# Altium PCB PCB2.PcbDoc
Units mm, origin at the board's own origin, x right, y up, seen from the top; angles counter-clockwise.
Board outline 145.8 x 166.24 mm, 2 copper layers (Top Layer, Bottom Layer); 14 components, 30 nets, 83 pads, 6 vias.
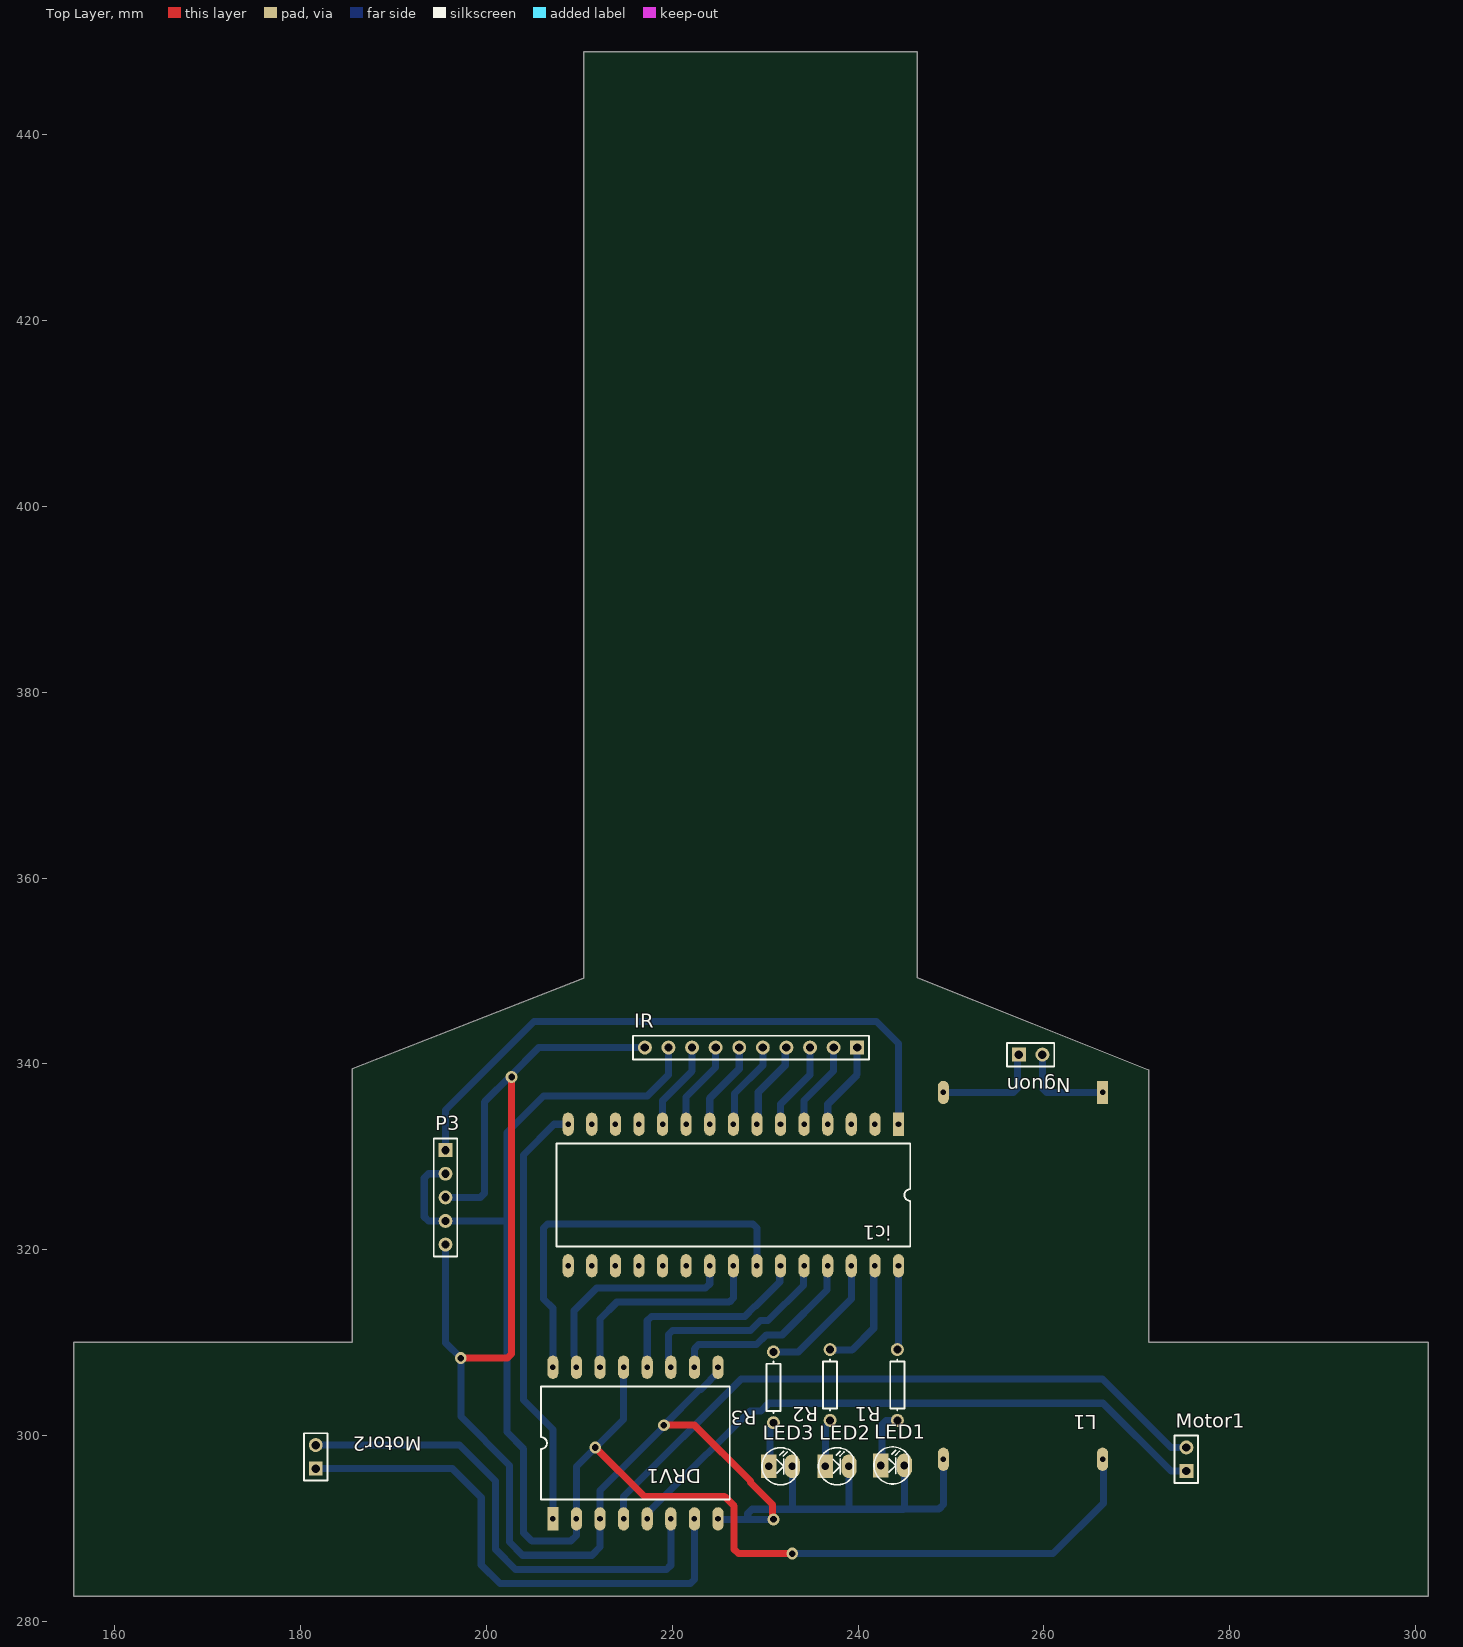
[diagram p0: Top Layer view]
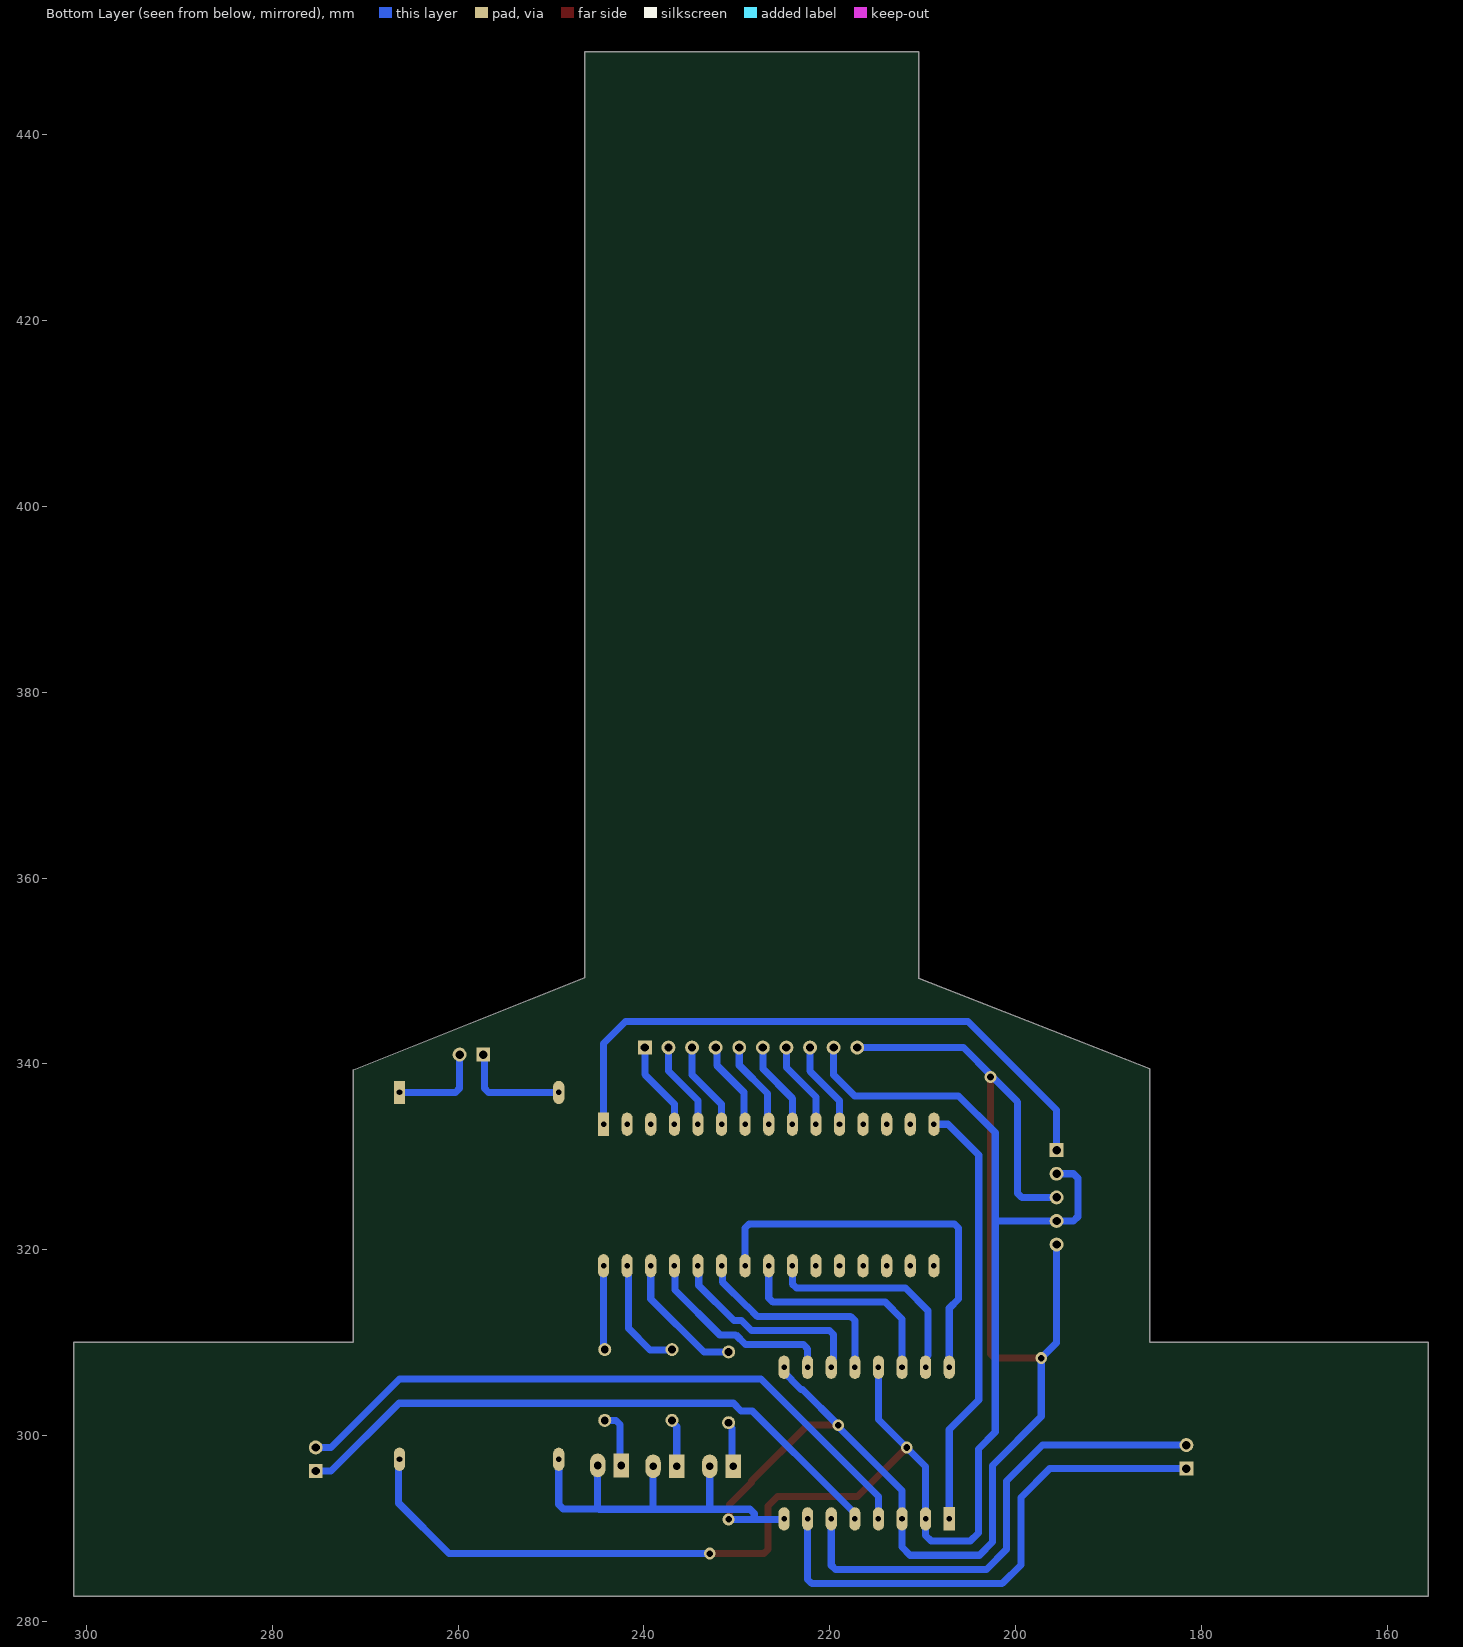
[diagram p1: Bottom Layer view, seen from below]

## Layer stack, top to bottom
Top Solder: solder mask 0.0102, Solder Resist, Dk 3.5
Top Layer: signal copper 0.0356
Dielectric 1: dielectric 0.32, FR-4, Dk 4.8
Bottom Layer: signal copper 0.0356
Bottom Solder: solder mask 0.0102, Solder Resist, Dk 3.5

## Board outline
301.371,282.702 301.371,310.007 271.272,310.007 271.272,339.344 246.38,349.25 246.38,448.945 210.439,448.945 210.439,349.236 185.547,339.457 185.547,310.007 155.575,310.007 155.575,282.702

## Design rules (kind name [scope] priority, off if disabled: settings)
Clearance [All] p1: gap=0.762 ignorepadtopadclearanceinfootprint=FALSE
PolygonConnect [All] p1: connectstyle=Relief reliefconductorwidth=0.254 reliefentries=4 polygonreliefangle="90 Angle" airgapwidth=0.254
RoomDefinition Sheet5 [InComponentClass('Sheet5')] p1: confinementstyle=ConfineIn formatcopy=TRUE lockcomponents=FALSE outline 0,0 50.8,0 50.8,25.4 0,25.4
RoutingVias [All] p1: holewidth=0.711 width=1.27 viastyle="Through Hole" minholewidth=0.711 minwidth=1.27 maxholewidth=0.711 maxwidth=1.27
SolderMaskExpansion [All] p1: expansion=0.102 istentingtop=FALSE
Width [All] p1: maxlimit=1.016 minlimit=0.508 preferedwidth=0.762
30 further rules are at their usual default settings.

## Classes and differential pairs
component class Sheet5: DRV1 ic1 IR L1 LED1 LED2 LED3 Motor1 Motor2 Nguon R1 R2 R3

## Components (designator, comment, footprint, x,y, rotation, side; value= is the part's Value field where it differs from the comment)
DRV1 "DRV TB6612" DIP16 207.137,291.02 r90 top
ic1 "ardiuno nano" "ardiuno nano" 1514.348,-936.498 r270 top
IR "Header 10" HDR1X10 239.903,341.757 r180 top
L1 "LM2596" "DIP4 - duplicate" 266.319,336.931 r270 top
LED1 "LED" LED-3 242.443,296.766 r0 top value="LED 3 ly Single Colour"
LED2 "LED" LED-3 236.474,296.672 r0 top value="LED 3 ly Single Colour"
LED3 "LED" LED-3 230.378,296.672 r0 top value="LED 3 ly Single Colour"
Motor1 "Header 2" HDR1X2 275.336,296.164 r90 top
Motor2 "Header 2" HDR1X2 181.61,296.418 r90 top
Nguon "Header 2" HDR1X2 257.302,340.995 r0 top
P3 "Header 5" HDR1X5 195.58,330.708 r270 top
R1 "Res1" AXIAL-0.3 244.221,305.435 r90 top value=30k
R2 "Res1" AXIAL-0.3 236.982,305.435 r90 top value=30k
R3 "Res1" AXIAL-0.3 230.886,305.181 r90 top value=30k

## Footprints (in the part's own frame and the unit in brackets; to place one, negate y for a bottom-side part, rotate by r counter-clockwise, add the part's x,y. Pads: shape width x height; smd on the part's side, far side on the other; paste and mask are expansions set on the pad)
"ardiuno nano" [mm]
  rect 2.5x1.2 hole 0.6: 1(-1270,-1270)
  oval 2.5x1.2 hole 0.6: 2(-1270,-1272.54) 3(-1270,-1275.08) 4(-1270,-1277.62) 5(-1270,-1280.16) 6(-1270,-1282.7) 7(-1270,-1285.24) 8(-1270,-1287.78) 9(-1270,-1290.32) 10(-1270,-1292.86) 11(-1270,-1295.4) 12(-1270,-1297.94) 13(-1270,-1300.48) 14(-1270,-1303.02) 15(-1270,-1305.56) 16(-1254.76,-1305.56) 17(-1254.76,-1303.02) 18(-1254.76,-1300.48) 19(-1254.76,-1297.94) 20(-1254.76,-1295.4) 21(-1254.76,-1292.86) 22(-1254.76,-1290.32) 23(-1254.76,-1287.78) 24(-1254.76,-1285.24) 25(-1254.76,-1282.7) 26(-1254.76,-1280.16) 27(-1254.76,-1277.62) 28(-1254.76,-1275.08) 29(-1254.76,-1272.54) 30(-1254.76,-1270)
  silkscreen extent -1267.91,-1306.83 -1256.84,-1268.73
AXIAL-0.3 [mm] "Axial Device, Thru-Hole; 2 Leads; 0.3 in Pin Spacing"
  round 1.4 hole 0.85: 1(-3.81,0) 2(3.81,0)
  silkscreen extent -2.77,-0.76 2.77,0.76
"DIP4 - duplicate" [mm]
  rect 2.5x1.2 hole 0.6: 1(0,0)
  oval 2.5x1.2 hole 0.6: 2(0,-17.145) 3(39.497,-17.145) 4(39.497,0)
  body extent -2.06,-19.01 41.43,1.99, height 12.41
DIP16 [mm]
  rect 2.5x1.2 hole 0.6: 1(0,0)
  oval 2.5x1.2 hole 0.6: 2(0,-2.54) 3(0,-5.08) 4(0,-7.62) 5(0,-10.16) 6(0,-12.7) 7(0,-15.24) 8(0,-17.78) 9(16.32,-17.78) 10(16.32,-15.24) 11(16.32,-12.7) 12(16.32,-10.16) 13(16.32,-7.62) 14(16.32,-5.08) 15(16.32,-2.54) 16(16.32,0)
  silkscreen extent 2.08,-19.05 14.24,1.27
HDR1X2 [mm] "Connector; Header; 2 Position"
  rect 1.5x1.5 hole 0.9: 1(0,0)
  round 1.5 hole 0.9: 2(2.54,0)
  silkscreen extent -1.27,-1.27 3.81,1.27
HDR1X5 [mm] "Connector; Header; 5 Position"
  rect 1.5x1.5 hole 0.9: 1(0,0)
  round 1.5 hole 0.9: 2(2.54,0) 3(5.08,0) 4(7.62,0) 5(10.16,0)
  silkscreen extent -1.27,-1.27 11.43,1.27
HDR1X10 [mm] "Connector; Header; 10 Position"
  rect 1.5x1.5 hole 0.9: 1(0,0)
  round 1.5 hole 0.9: 2(2.54,0) 3(5.08,0) 4(7.62,0) 5(10.16,0) 6(12.7,0) 7(15.24,0) 8(17.78,0) 9(20.32,0) 10(22.86,0)
  silkscreen extent -1.27,-1.27 24.13,1.27
LED-3 [mil] "LED 2 PIN, 3ly Only colour"
  rect 65x100 hole 32: 1(0,0)
  oval 65x100 hole 32: 2(100,0)
  silkscreen extent -29,-78 118,79, body extent -13,-75 125,75, height 217

## Part data
DRV1: library part "DRN TB6612"
IR: "Header, 10-Pin", LatestRevisionDate=17-Jul-2002, LatestRevisionNote="Re-released for DXP Platform.", Publisher="Altium Limited"
LED1 LED2 LED3: "LED Single colour Green and Red"
Motor1 Motor2 Nguon: "Header, 2-Pin", LatestRevisionDate=17-Jul-2002, LatestRevisionNote="Re-released for DXP Platform.", Publisher="Altium Limited"
P3: "Header, 5-Pin", LatestRevisionDate=17-Jul-2002, LatestRevisionNote="Re-released for DXP Platform.", Publisher="Altium Limited"
R1 R2 R3: "Resistor", LatestRevisionDate=17-Jul-2002, LatestRevisionNote="Re-released for DXP Platform.", PackageDescription="Axial Device, Thru-Hole; 2 Leads; 0.3 in Pin Spacing", PackageReference=AXIAL-0.3, Published=8-Jun-2000, Publisher="Altium Limited"

## Via types
v1: diameter 1.27, hole 0.711, Top Layer to Bottom Layer, 6 vias

## Nets (pads, with @x,y where several pads share a name; then routed paths per layer and width w, separated by ;. In a path a pad name is that pad's centre, name@x,y a point inside that pad or via, vN(x,y) a via of type N, cw(c..) or ccw(c..) an arc to the next point about the centre after c; other vN are vias at no path point)
CB: ic1.1 P3.1 | length 66.7
  Bottom Layer w0.762: P3.1 195.58,335.026 205.105,344.551 241.997,344.551 244.348,342.2 ic1.1
Gnd: DRV1.3 DRV1.8 DRV1.9 IR.10 L1.3 LED1.2 LED2.2 LED3.2 P3.3 P3.5 | length 203.5
  Top Layer w0.762: v1(197.231,308.326) 202.246,308.326 202.692,308.773 v1(202.692,338.582) ; v1(219.088,301.104) 222.39,301.104 228.409,295.084 228.409,294.929 230.789,292.549 230.789,291.054 v1(230.886,290.957)
  Bottom Layer w0.762: P3.5 195.58,309.977 v1(197.231,308.326) 197.231,302.021 202.477,296.775 202.477,288.509 203.883,287.103 211.346,287.103 212.217,287.974 DRV1.3 212.217,294.065 v1@219.172,301.02 ; P3.3 199.325,325.628 199.771,326.074 199.771,335.915 202.565,338.709 205.613,341.757 IR.10 ; v1(219.088,301.104) 222.931,304.947 223.099,304.947 224.12,305.968 224.12,306.025 224.566,306.471 224.579,306.471 224.917,306.809 DRV1.9 ; DRV1.8 224.98,290.957 228.123,290.957 ; v1(230.886,290.957) 228.123,290.957 ; LED3.2 232.918,292.051 ; LED2.2 239.014,292.051 ; 244.905,292.1 248.728,292.1 249.174,292.546 L1.3 ; LED1.2 244.983,292.178 244.856,292.051 239.014,292.051 ; 228.123,290.957 228.123,291.605 228.57,292.051 232.918,292.051 ; 232.918,292.051 239.014,292.051
INA1: DRV1.14 ic1.23 | length 24
  Bottom Layer w0.762: DRV1.14 212.217,312.547 214.015,314.345 226.122,314.345 226.568,314.791 ic1.23
INA2: DRV1.15 ic1.22 | length 22.6
  Bottom Layer w0.762: 209.407,308.594 209.407,313.42 211.856,315.869 223.582,315.869 224.028,316.315 ic1.22
INB1: DRV1.12 ic1.25 | length 22.8
  Bottom Layer w0.762: DRV1.12 217.297,312.375 217.743,312.821 227.799,312.821 228.86,313.882 228.919,313.882 231.564,316.527 231.564,318.178 ic1.25
INB2: DRV1.11 ic1.26 | length 21.4
  Bottom Layer w0.762: DRV1.11@219.583,308.272 219.583,310.851 220.029,311.297 228.43,311.297 229.491,312.358 230.316,312.358 234.104,316.146 234.104,318.178 ic1.26
IR1: ic1.4 IR.1 | length 9.6
  Bottom Layer w0.762: ic1.4 236.728,335.661 239.903,338.836 IR.1
IR2: ic1.5 IR.2 | length 9.6
  Bottom Layer w0.762: ic1.5 234.188,336.042 237.363,339.217 IR.2
IR3: ic1.6 IR.3 | length 9.6
  Bottom Layer w0.762: ic1.6 231.648,335.657 234.823,338.832 IR.3
IR4: ic1.7 IR.4 | length 9.6
  Bottom Layer w0.762: ic1.7 229.251,333.645 229.251,336.947 232.156,339.852 232.156,341.63 IR.4
IR5: ic1.8 IR.5 | length 9.6
  Bottom Layer w0.762: ic1.8 226.711,333.645 226.711,336.82 229.743,339.852 IR.5
IR6: ic1.9 IR.6 | length 9.6
  Bottom Layer w0.762: ic1.9 224.028,336.292 227.203,339.467 IR.6
IR7: ic1.10 IR.7 | length 9.6
  Bottom Layer w0.762: ic1.10 221.488,336.423 224.663,339.598 IR.7
IR8: ic1.11 IR.8 | length 9.6
  Bottom Layer w0.762: ic1.11 218.948,336.038 222.123,339.213 IR.8
"led 1": ic1.30 R1.2 | length 9.1
  Bottom Layer w0.762: R1.2 244.221,309.418 244.348,309.545 ic1.30
"led 2": ic1.29 R2.2 | length 12.5
  Bottom Layer w0.762: R2.2 237.012,309.215 239.365,309.215 241.681,311.531 241.681,317.175 241.724,317.218 241.724,318.178 ic1.29
"led 3": ic1.28 R3.2 | length 14.3
  Bottom Layer w0.762: R3.2 233.553,308.991 239.268,314.706 ic1.28
NetDRV1_4: DRV1.4 Motor1.2 | length 71.3
  Bottom Layer w0.762: DRV1.4 214.757,293.413 227.414,306.07 266.319,306.07 273.685,298.704 Motor1.2
NetDRV1_5: DRV1.5 Motor1.1 | length 66.6
  Bottom Layer w0.762: DRV1.5 217.297,291.592 218.094,292.389 218.094,292.392 219.115,293.413 219.118,293.413 228.346,302.641 229.55,302.641 230.377,303.468 266.381,303.468 273.685,296.164 Motor1.1
NetDRV1_6: DRV1.6 Motor2.2 | length 53.3
  Bottom Layer w0.762: Motor2.2 197.104,298.958 200.953,295.109 200.953,287.743 203.117,285.579 219.391,285.579 219.837,286.025 DRV1.6
NetDRV1_7: DRV1.7 Motor2.1 | length 56.9
  Bottom Layer w0.762: Motor2.1 196.342,296.418 199.429,293.331 199.429,286.06 201.434,284.055 221.931,284.055 222.377,284.501 DRV1.7
NetL1_1: L1.1 Nguon.2 | length 10.3
  Bottom Layer w0.762: Nguon.2 259.842,337.377 260.288,336.931 L1.1
NetL1_2: L1.2 Nguon.1 | length 11.9
  Bottom Layer w0.762: L1.2 256.729,336.931 257.175,337.377 257.175,340.868 Nguon.1
NetLED1_1: LED1.1 R1.1 | length 6.3
  Bottom Layer w0.762: LED1.1 242.57,296.893 242.57,301.179 243.016,301.625 R1.1
NetLED2_1: LED2.1 R2.1 | length 5.2
  Bottom Layer w0.762: LED2.1 236.474,300.944 236.982,301.452 R2.1
NetLED3_1: LED3.1 R3.1 | length 4.9
  Bottom Layer w0.762: LED3.1 230.505,296.799 230.505,300.817 230.886,301.198 R3.1
PWMA: DRV1.16 ic1.24 | length 42.8
  Bottom Layer w0.762: DRV1.16 207.137,313.69 206.121,314.706 206.121,322.318 206.567,322.764 228.662,322.764 229.108,322.318 ic1.24
PWMB: DRV1.10 ic1.27 | length 21.5
  Bottom Layer w0.762: DRV1.10 222.377,309.327 222.823,309.773 229.062,309.773 230.123,310.834 231.84,310.834 236.644,315.638 236.644,318.178 ic1.27
Vcc: DRV1.2 DRV1.13 IR.9 L1.4 P3.2 P3.4 | length 177.9
  Top Layer w0.762: v1(211.709,298.704) 217,293.413 225.639,293.413 226.66,292.392 226.66,287.72 227.106,287.274 v1(232.918,287.274)
  Bottom Layer w0.762: P3.2 193.74,328.168 193.294,327.722 193.294,323.534 193.74,323.088 202.184,323.088 ; DRV1.13 214.757,301.72 209.677,296.64 DRV1.2 209.677,289.231 209.073,288.627 204.872,288.627 204.001,289.498 204.001,298.538 202.184,300.355 202.184,323.088 ; IR.9 219.583,338.829 217.304,336.55 206.121,336.55 202.184,332.613 202.184,323.088 ; v1(232.918,287.274) 260.985,287.274 266.403,292.692 L1.4@266.403,297.198
Vin: DRV1.1 ic1.15 | length 46.7
  Bottom Layer w0.762: DRV1.1 207.137,296.545 207.137,300.646 203.962,303.821 203.962,330.2 207.264,333.502 ic1.15
pads on no net: ic1.2 ic1.3 ic1.12 ic1.13 ic1.14 ic1.16 ic1.17 ic1.18 ic1.19 ic1.20 ic1.21

## Silkscreen, mask and mechanical layers (free items; w line width, h text height)
Mechanical 1:
  the board outline again, w0.762